# Altium PCB cjb.PcbDoc (part 2 of 2)
Units mil, origin at the board's own origin, x right, y up, seen from the top; angles counter-clockwise.
Board outline 3345 x 2980 mil, 2 copper layers (Top Layer, Bottom Layer), stack 62.8 mil thick; 121 components, 83 nets, 395 pads, 135 vias.
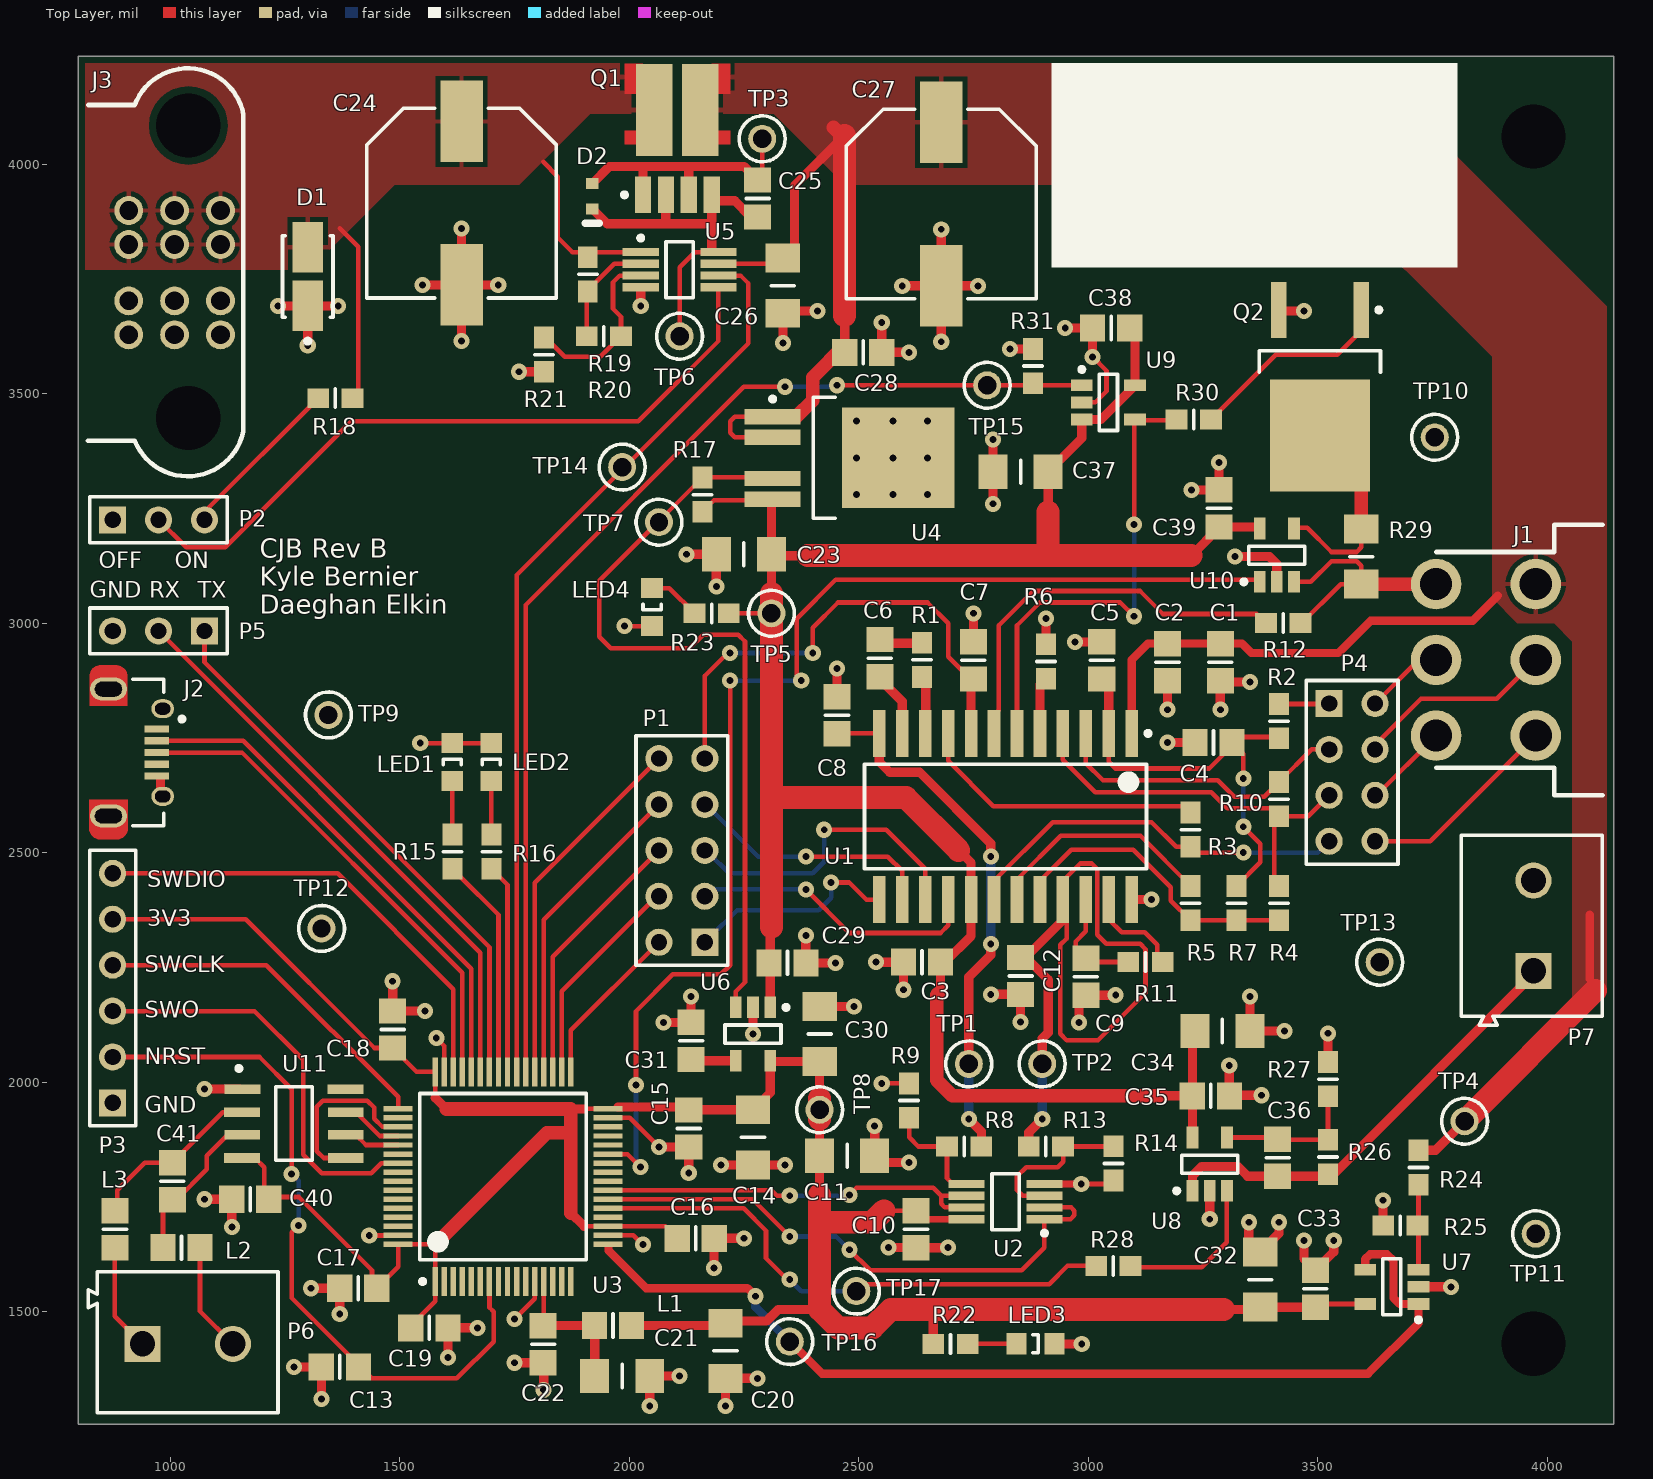
[diagram p0: Top Layer view]

## Via types
v1: diameter 35, hole 15, Top Layer to Bottom Layer, tented both sides, 107 vias
v2: diameter 35, hole 15, Top Layer to Bottom Layer, 28 vias

## Nets (pads, with @x,y where several pads share a name; then routed paths per layer and width w, separated by ;. In a path a pad name is that pad's centre, name@x,y a point inside that pad or via, vN(x,y) a via of type N, cw(c..) or ccw(c..) an arc to the next point about the centre after c; other vN are vias at no path point) (continued)
SWCLK: (continued)
  Top Layer w10: P3.4 1210,2255 1497.01,1967.99 U3.49
SWDIO: P3.6 U3.46 | length 1026.8
  Top Layer w10: P3.6 1365,2455 1617.09,2202.91 U3.46
SWO: P3.3 U3.55 | length 898.4
  Top Layer w10: P3.3 1183.99,2155 1290,2048.99 1290,1842.36 1330.48,1801.88 1438.49,1801.88 1460.44,1823.83 U3.55
THERMO+: L2.1 P6.2 | length 239.3
  Top Layer w10: L2.1 1065.35,1501.5 P6.2
THERMO-: L3.1 P6.1 | length 240.3
  Top Layer w10: L3.1@865.94,1639.65 880,1625.59 880,1490 P6.1
THERMO_CLK: U3.51 U11.5 | length 386.8
  Top Layer w10: U11.5 1335,1835 1320,1850 1320,1946.94 1333.06,1960 1430,1960 1445,1945 1445,1920.35 1462.78,1902.57 U3.51
THERMO_DAT: U3.52 U11.7 | length 135.6
  Top Layer w10: U11.7 1405,1935 1457.11,1882.89 U3.52
THERMO_SEL: U3.53 U11.6 | length 123.6
  Top Layer w10: U11.6 1404.61,1885.39 1426.8,1863.2 U3.53
UA: C12.2 R13.1 TP2.1 U1.21 | length 1648.7
  Top Layer w10: C12.2 C12.2@2864.15,2271.85 ; U1.21@2945,2352.7 U1.21 ; U1.21 2952.94,2389.86 2952.94,2312.94 2939.23,2299.23 2939.23,2105.2 2952.94,2091.5 3021.5,2091.5 3125,2195 3125,2290 3113.5,2301.5 3039.65,2301.5 3020.22,2320.92 3020.22,2464.21 3007.94,2476.5 2983.17,2476.5 2952.94,2446.26 2952.94,2405.73 U1.21
  Top Layer w20: R13.1 2870.54,1890.6 v2(2899.94,1920) ; TP2.1 2899.94,2095.29 2912.94,2108.29 2912.94,2223.06 2864.15,2271.85 U1.21@2945,2352.7
  Bottom Layer w20: v2(2899.94,1920) TP2.1
UART_RX: P5.2 U3.43 | length 1250.9
  Top Layer w10: P5.2 1676.14,2282 U3.43
UART_TX: P5.1 U3.42 | length 1217.6
  Top Layer w10: P5.1 1075,2915 1695.83,2294.17 U3.42
UR: C8.2 R8.1 TP1.1 U1.12 | length 1177.6
  Top Layer w10: C8.2@2441.27,2769.25 2450.52,2760 2452.94,2760 U1.12
  Top Layer w20: U1.12 2545,2697.9 2567.8,2675.1 2632.94,2675.1 2787.94,2520.1 v2(2787.94,2491.5) ; v2(2740,1920) 2767.4,1892.6 R8.1 ; TP1.1 2740,2229.09 2787.94,2277.03 v2(2787.94,2301.5)
  Bottom Layer w20: v2(2740,1920) TP1.1 ; v2(2787.94,2301.5) v2(2787.94,2491.5)
USB_D_N: J2.2 U3.44 | length 1120.2
  Top Layer w10: J2.2@966.26,2743.73 J2.2 1159.55,2743.73 1656.46,2246.83 U3.44
USB_D_P: J2.3 U3.45 | length 1084.9
  Top Layer w10: J2.3@966.26,2718.14 J2.3 1156.86,2718.14 1636.77,2238.23 U3.45
VBAT: C24.1 D1.2 J3.1 J3.2 J3.3 J3.4 J3.5 J3.6 Q1.6 R18.2 R19.1 U5.1 | length 763.6
  Top Layer w10: 1370,3860 1410,3820 1410,3502.6 R18.2 ; 1812.85,4005 1845,3972.85 1845,3840 1876.61,3808.39 U5.1
VDDA: C21.2 C22.2 L1.2 U3.13 | length 289.8
  Top Layer w10: 1813.94,1498.23 U3.13
  Top Layer w20: C22.2@1813.25,1470 L1.2 ; C21.2 L1.2@1925,1469.65
  Top Layer w30: C22.2 C22.2@1813.25,1470 ; L1.2 L1.2@1925,1469.65
pads on no net: J2.1 J2.4 J3.25 J3.26 U3.2 U3.3 U3.4 U3.5 U3.6 U3.8 U3.9 U3.10 U3.11 U3.14 U3.15 U3.16 U3.20 U3.24 U3.25 U3.26 U3.28 U3.29 U3.30 U3.50 U3.54 U3.56 U3.57 U3.58 U3.59 U3.60 U3.61 U3.62 U11.8
copper on no net: | length 6.7
  Top Layer w10: 1490.34,1804.15 1497.01,1804.15

## Polygon pours and split planes (outlines as drawn)
12V on Top Layer "Top Layer-12V" (solid, pour order 46): 3225,3955 3505,3955 3880,3580 3880,3055 3935,3000 4015,3000 4055,2960 4055,2125 4130,2200 4130,3000 4130,3690 3600,4220 3240,4220 2255,4220 2230,4220 2230,4195 2180,4195 2180,4185.32 2230,4185.32 2230,4160 2180,4160 2180,4110 2315,4110 2470,3955
VBAT on Top Layer "Top Layer-12V" (solid, pour order 28): 815,3770 815,4220 1755,4220 1895,4220 1980,4220 1980,4195 2025.35,4195 2025.35,4185.32 1980,4185.32 1980,4160 2005,4160.32 2005,4135 2025.35,4135 2025.35,4110 1915.35,4110 1760.35,3955 1490,3955 1305,3770
no net on Top Layer "Top Layer-No Net 1" (solid, pour order 6): 4170,1500
GND on Bottom Layer "Bottom Layer-GND" (solid, remove dead copper, pour order 4): 4130,4220 815,4220 815,1270 4130,1270

## Other copper
Top Layer:
  region: 1441.1,1607.63
  region: 2750,1598.65
Bottom Layer:
  pour cut-out: 3665.41,2342.27

## Silkscreen, mask and mechanical layers (free items; w line width, h text height)
Top Overlay:
  rectangle: 2920,3775 3805,4220
  text "OFF" at 845,3120 h36
  text "ON" at 1010,3120 h36
  text "GND" at 825,3055 h36
  text "RX" at 955,3055 h36
  text "TX" at 1060,3055 h36
  text "CJB Rev B / Kyle Bernier  / Daeghan Elkin" at 1195,3020 h41
  text "SWDIO" at 950,2425 h36
  text "3V3" at 950,2340 h36
  text "SWCLK" at 945,2240 h36
  text "SWO" at 945,2140 h36
  text "NRST" at 945,2038.73 h36
  text "GND" at 945,1933.73 h36
Bottom Overlay:
  lines w10: 1535,3135 cw(c1525,3135) 1515,3135 cw(c1535,3135) 1555,3135 cw(c1525,3135) 1495,3135 cw(c1535,3135) 1575,3135 cw(c1525,3135) 1475,3135 cw(c1535,3135) 1595,3135 cw(c1525,3135) 1455,3135 cw(c1535,3135) 1615,3135 cw(c1525,3135) 1435,3135 cw(c1535,3135) 1635,3135 cw(c1525,3135) 1415,3135 cw(c1535,3135) 1655,3135 cw(c1525,3135) 1395,3135 cw(c1535,3135) 1675,3135 cw(c1525,3135) 1375,3135 cw(c1535,3135) 1695,3135 cw(c1525,3135) 1355,3135 cw(c1535,3135) 1715,3135 cw(c1525,3135) 1335,3135 cw(c1535,3135) 1735,3135 cw(c1525,3135) 1315,3135 cw(c1535,3135) 1755,3135 cw(c1525,3135) 1295,3135 cw(c1535,3135) 1775,3135 cw(c1525,3135) 1275,3135 cw(c1535,3135) 1795,3135 cw(c1525,3135) 1255,3135 cw(c1535,3135) 1815,3135 cw(c1525,3135) 1235,3135 cw(c1535,3135) 1835,3135 ccw(c2435,3135) 1904.37,2854.94
  text "SOURCE" at 2395,3960 h36
  text "GATE" at 2175,3530 h36
  text "PWM_EN" at 3040,3495 h36
  text "GND" at 3905,3385 h36
  text "BAT_FAULT" at 2350,3325 h36
  text "5V_RESET" at 2190,3130 h36
  text "5V" at 2425,3000 h36
  text "UN" at 3455,2810 h36
  text "GND" at 1290,2785 h36
  text "IP" at 3455,2705 h36
  text "CJ_RESET" at 1995,2690 h36
  text "IA" at 3455,2605 h36
  text "CJ_MOSI" at 1995,2585 h36
  text "VM" at 3455,2505 h36
  text "CJ_MISO" at 1995,2490 h36
  text "GND" at 3910,2420 h36
  text "CJ_SCK" at 1995,2385 h36
  text "GND" at 1475,2315 h36
  text "CJ_SEL" at 1995,2285 h36
  text "DAC" at 3905,2225 h36
  text "GND" at 3680,2175 h36
  text "UA" at 3015,2025 h36
  text "UV" at 2685,2020 h36
  text "3V3" at 2360,1922.26 h36
  text "12V" at 3970,1895 h36
  text "GND" at 3925,1655 h36
  text "DAC_OUT" at 2787.94,1530 h36
  text "TC-" at 975,1495 h36
  text "TC+" at 1180,1495 h36
  text "12V_BUF" at 2295,1415 h36
Mechanical 1:
  the board outline again, w10